# Altium PCB GyroscopeBreakout.PcbDoc
Units mil, origin at the board's own origin, x right, y up, seen from the top; angles counter-clockwise.
Board outline 1675 x 885.18 mil, 2 copper layers (Top Layer, Bottom Layer); 2 components, 5 nets, 21 pads, 0 vias.
Unrouted connection lines stored in the file: 2.
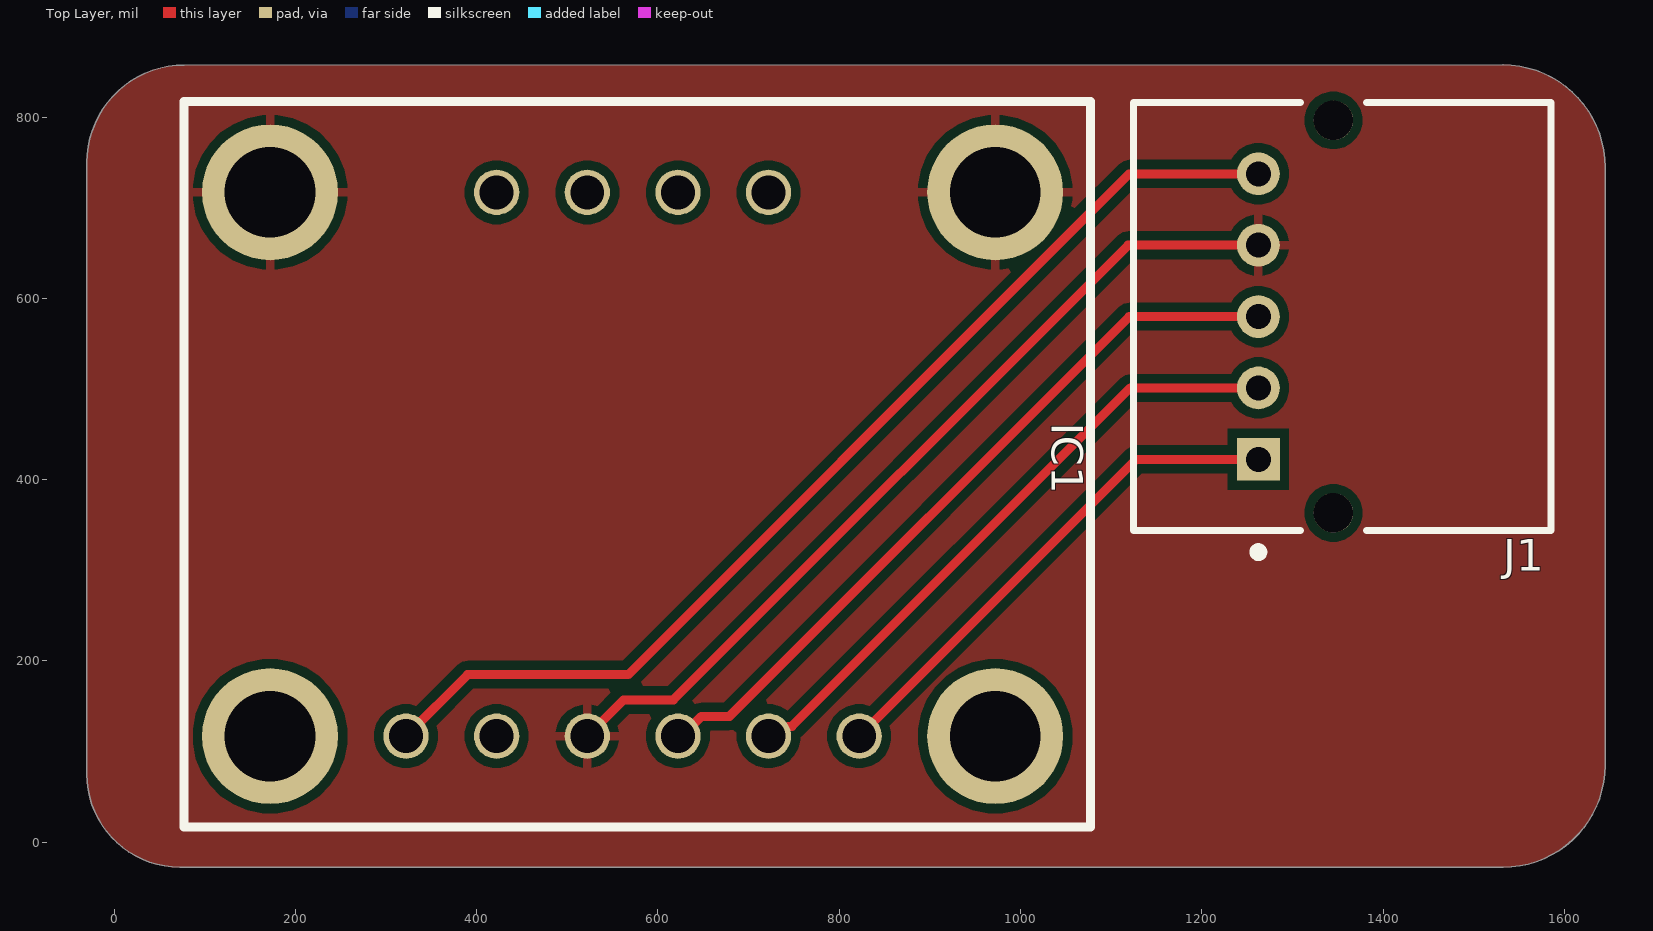
[diagram p0: Top Layer view]
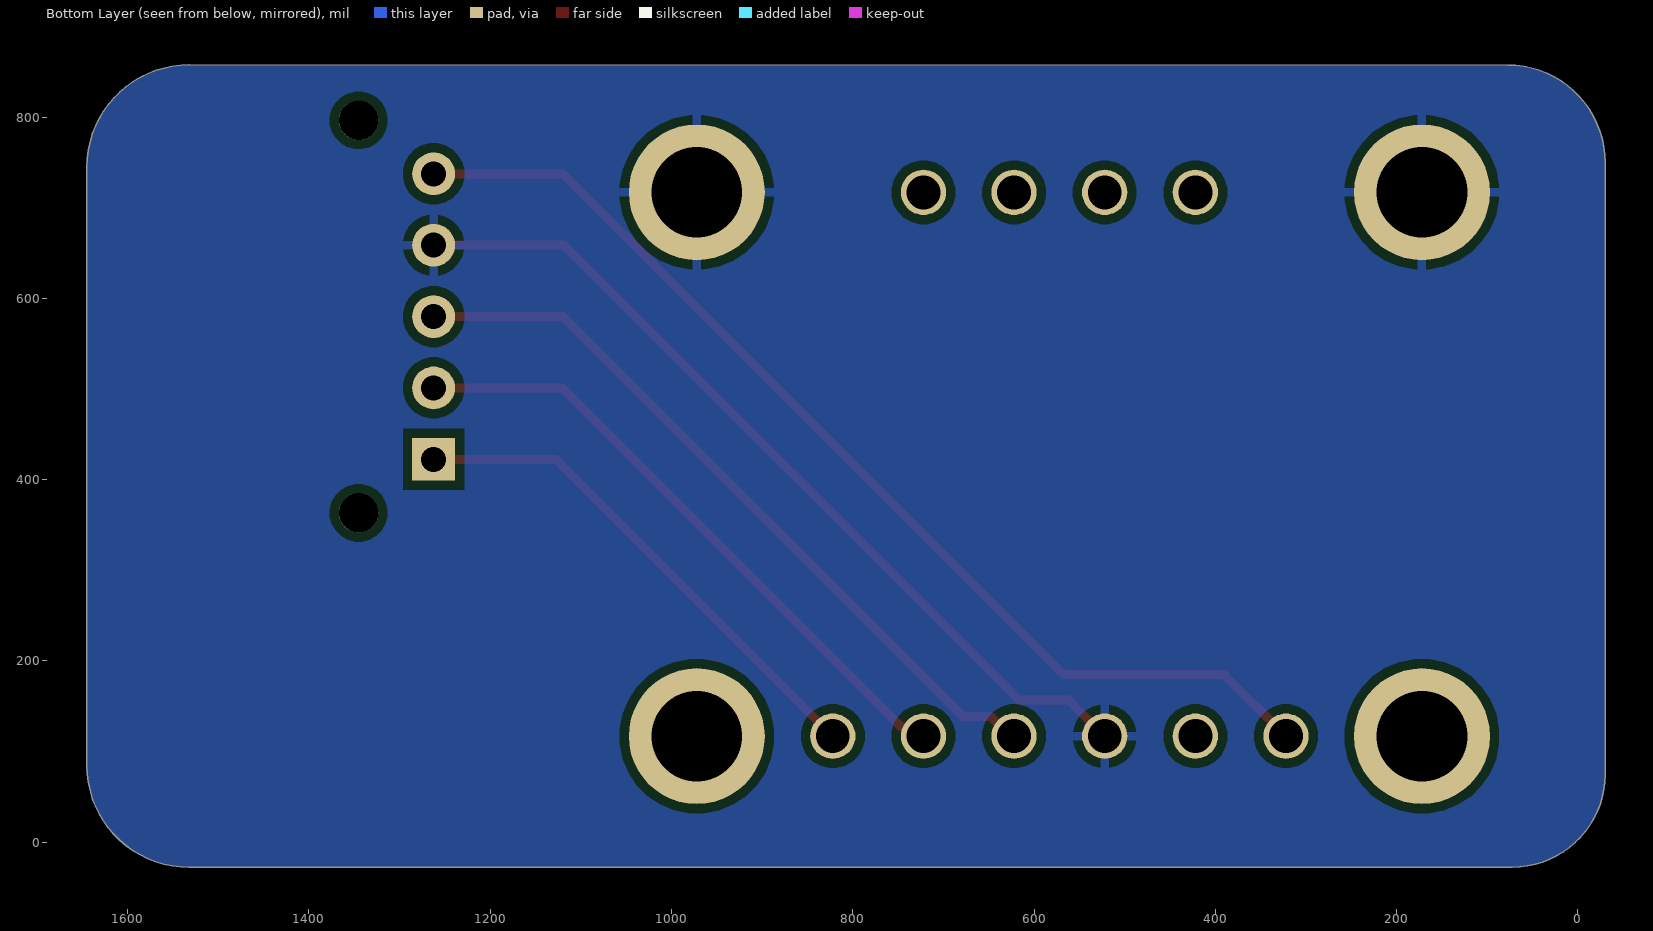
[diagram p1: Bottom Layer view, seen from below]

## Layer stack, top to bottom
Top Solder: solder mask 0.4, Solder Resist, Dk 3.5
Top Layer: signal copper 1.4
Dielectric 1: dielectric 12.6, FR-4, Dk 4.8
Bottom Layer: signal copper 1.4
Bottom Solder: solder mask 0.4, Solder Resist, Dk 3.5

## Board outline
72.4,-27.4 cw(c72.4,75) -30,75 -30,750 cw(c77.53,750) 77.53,857.53 1532.34,857.66 cw(c1532.34,745) 1645,745 1645,85 cw(c1532.48,85) 1532.48,-27.52

## Design rules (kind name [scope] priority, off if disabled: settings)
Clearance [All] p1: gap=10 ignorepadtopadclearanceinfootprint=FALSE except(0: Arc-Hole Track-Hole SMDPad-Hole THPad-Hole Via-Hole Fill-Hole Poly-Hole Region-Hole Text-Hole)
PolygonConnect [All] p1: connectstyle=Relief reliefconductorwidth=10 reliefentries=4 polygonreliefangle="90 Angle" airgapwidth=10
RoutingVias [All] p1: holewidth=28 width=50 viastyle="Through Hole" minholewidth=28 minwidth=50 maxholewidth=28 maxwidth=50
SolderMaskExpansion [All] p1: expansion=4 istentingtop=FALSE
Width [All] p1: maxlimit=10 minlimit=10 preferedwidth=10
30 further rules are at their usual default settings.

## Components (designator, comment, footprint, x,y, rotation, side; value= is the part's Value field where it differs from the comment)
IC1 "Adafruit BNO055" "Adafruit BNO055-Footprint-1" 572.07,417.07 r0 top
J1 "S05B-PASK-2(LF)(SN)" FP-S05B-PASK-2_LF_SN-MFG 1355,580 r270 top

## Footprints (in the part's own frame and the unit in brackets; to place one, negate y for a bottom-side part, rotate by r counter-clockwise, add the part's x,y. Pads: shape width x height; smd on the part's side, far side on the other; paste and mask are expansions set on the pad)
"Adafruit BNO055-Footprint-1" [mm]
  round 1.27 hole 0.95: 1(-3.81,7.62) 2(-1.27,7.62) 3(1.27,7.62) 4(3.81,7.62) 5(6.35,-7.62) 6(3.81,-7.62) 7(1.27,-7.62) 8(-1.27,-7.62) 9(-3.81,-7.62) 10(-6.35,-7.62)
  round 3.81 hole 2.54: GND1(-10.16,7.62) GND2(10.16,7.62) GND3(10.16,-7.62) GND4(-10.16,-7.62)
  silkscreen extent -12.57,-10.16 12.83,10.16
FP-S05B-PASK-2_LF_SN-MFG [mm]
  rect 1.2x1.2 hole 0.7 paste-1000 mask+0: 1(4,-2.35)
  round 1.2 hole 0.7 paste-1000 mask+0: 2(2,-2.35) 3(0,-2.35) 4(-2,-2.35) 5(-4,-2.35)
  round 1.1 hole 1.1 unplated paste-1000 mask+0: ""(-5.5,-0.25) ""(5.5,-0.25)
  silkscreen extent -6,-5.85 6.72,5.85, body extent -6.15,-5.95 6.15,5.95, height 0.25

## Part data
IC1: library part CMP-001-0001-2
J1: library part CMP-17439-000393-1, "CONN HEADER R/A 5POS 2MM", Color=Natural, Current Rating=3A, Flammability Rating="UL94 V-0", Housing Color=White, Package Quantity=500, Voltage Rating=250V, Connector Type=Header, Contact Finish - Mating=TIN, Contact Material="Copper Alloy", Contact Plating=Tin, Contact Shape=Square, Contact Type="Male Pin", Fastening Type=Ramp, Insulation Color=Natural, Insulation Material=PBT, Lead Free="Lead Free", Mount="Through Hole", Number of Contacts=5, Number of Positions=5, Number of Rows=1, Orientation="Right Angle", Packaging=Bulk, Pitch=2mm, Series=PA, Termination=Solder

## Nets (pads, with @x,y where several pads share a name; then routed paths per layer and width w, separated by ;. In a path a pad name is that pad's centre, name@x,y a point inside that pad or via, vN(x,y) a via of type N, cw(c..) or ccw(c..) an arc to the next point about the centre after c; other vN are vias at no path point)
5V: IC1.10 J1.5 | length 1197.4
  Top Layer w10: IC1.10 390,185 567.28,185 1035.71,653.43 1119.76,737.48 J1.5
GND: IC1.8 IC1.GND1 IC1.GND2 IC1.GND3 IC1.GND4 J1.4 | length 964.8
  Top Layer w10: IC1.8 562.07,157.07 617.07,157.07 1118.74,658.74 J1.4
GyroReset: IC1.5 J1.1 | length 566.9
  Top Layer w10: IC1.5 1127.52,422.52 J1.1
SCL: IC1.7 J1.3 | length 832.2
  Top Layer w10: IC1.7 626.21,117.07 647.93,138.79 678.79,138.79 1120,580 J1.3
SDA: IC1.6 J1.2 | length 699.5
  Top Layer w10: IC1.6 732.89,117.07 743.68,127.86 747.86,127.86 1121.26,501.26 J1.2
pads on no net: IC1.1 IC1.2 IC1.3 IC1.4 IC1.9 J1.

## Polygon pours and split planes (outlines as drawn)
GND on Top Layer "Top Ground" (solid, pour order 0): 72.4,-27.4 cw(c72.4,75) -30,75 -30,750 cw(c77.53,750) 77.53,857.53 1532.34,857.66 cw(c1532.34,745) 1645,745 1645,85 cw(c1532.48,85) 1532.48,-27.52
GND on Bottom Layer "Bottom Ground" (solid, pour order 1): 72.4,-27.4 cw(c72.4,75) -30,75 -30,750 cw(c77.53,750) 77.53,857.53 1532.34,857.66 cw(c1532.34,745) 1645,745 1645,85 cw(c1532.48,85) 1532.48,-27.52

## Silkscreen, mask and mechanical layers (free items; w line width, h text height)
Top Solder:
  text "Gyroscope" at 1100,87.83 h70
  text "Breakout Board" at 1100.05,20 h70
Bottom Solder:
  region: 1224 vertices and 7 holes, not listed, extent 347.73,260.12 797.97,672.13
  text "JANK" at 725,165 h120
  text "Designed by Jouveer" at 714.95,-7.27 h70
Mechanical 1:
  the board outline again, w10